# EAGLE board napajanje (EAGLE 3.55)
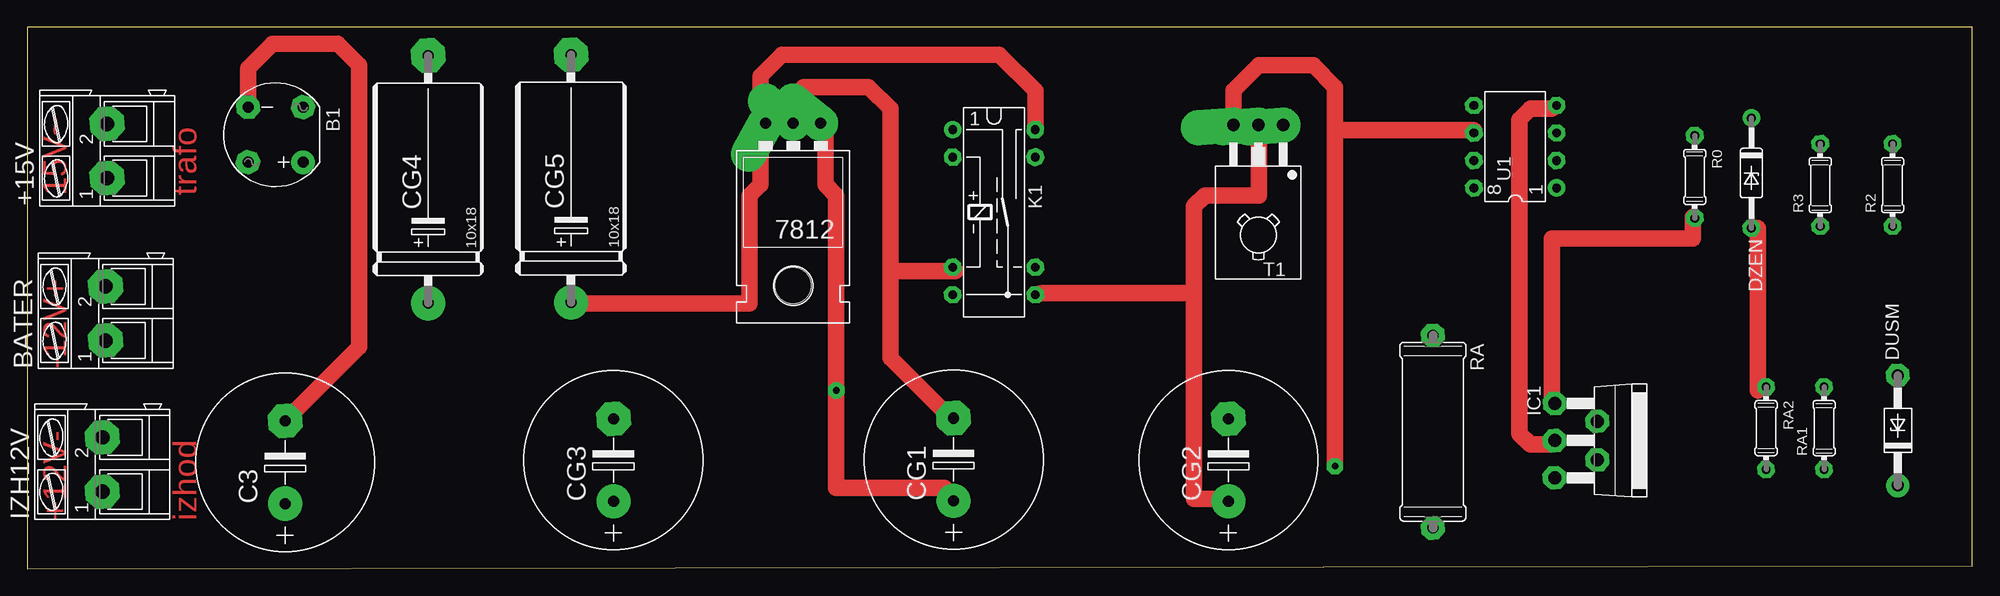
[diagram p0: board, top side]
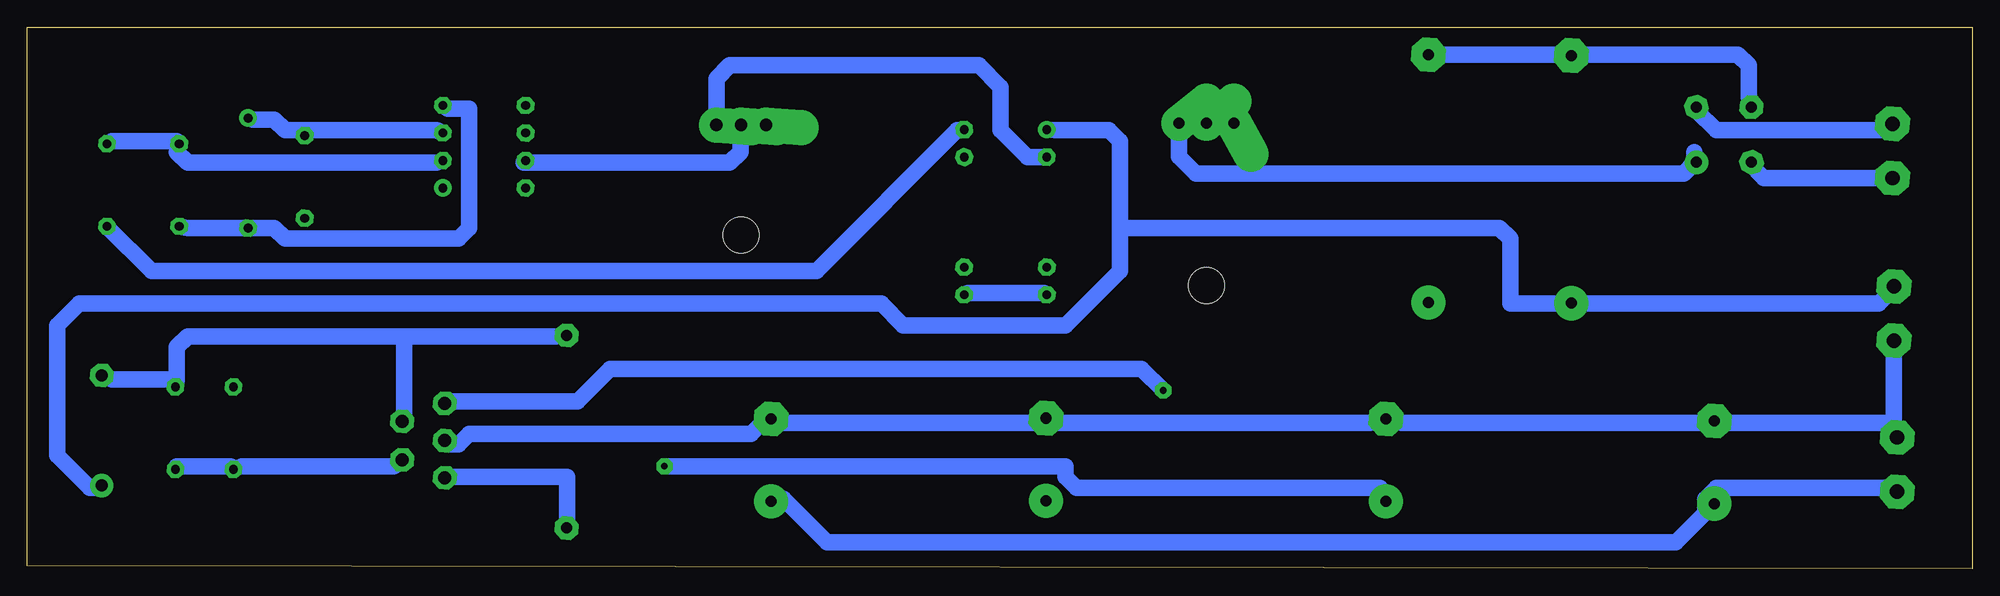
[diagram p1: board, bottom side, seen from below]

Size 179.42 x 50 mm. Coordinates in mm from the lower left corner, seen from the top.
Outline: 0,0 179.42,0.27 179.42,50 0,50 0,0
Copper layers used: Top, Bottom

## Footprints (pad centres in the part's own frame; a part is rotated, then mirrored left to right if it is on the bottom)
XXL = drill 1.016 pad 3.251 offset:  -2.54,-3.81;  0,-3.81;  2.54,-3.81 | hole 3.302: 0,11.176
300/2 = drill 1.321 pad 3.15 octagon:  -2.515,0;  2.489,0
1A = drill 1.016 pad 2.159 round:  -2.54,2.54 | drill 1.016 pad 2.159 octagon:  2.54,2.54;  2.54,-2.54;  -2.54,-2.54
,5-16 = drill 1.016 pad 3.15 octagon:  3.81,0 | drill 1.016 pad 3.15 round:  -3.81,0
2-10 = drill 1.016 pad 3.15 round:  -11.43,0 | drill 1.016 pad 3.15 octagon:  11.43,0
41Z10 = drill 1.118 pad 2.159 round:  -5.08,0 | drill 1.118 pad 2.159 octagon:  5.08,0
35Z10 = drill 0.813 pad 1.6 round:  -5.08,0 | drill 0.813 pad 1.6 octagon:  5.08,0
00S = drill 1.194 pad 2.159 octagon:  -3.429,-8.509;  -1.778,-4.572;  0,-8.509;  1.778,-4.572;  3.429,-8.509
1U = drill 0.813 pad 1.6 round:  -7.62,-3.81 | drill 0.813 pad 1.6 octagon:  -5.08,-3.81;  5.08,-3.81;  7.62,-3.81;  7.62,3.81;  5.08,3.81;  -5.08,3.81;  -7.62,3.81
04/7 = drill 0.813 pad 1.6 octagon:  -3.81,0;  3.81,0
17/17 = drill 1.016 pad 2.159 octagon:  -8.89,0;  8.89,0
126 = drill 1.118 pad 3.251 offset:  -2.286,-5.08;  0,-5.08;  2.286,-5.08 | hole 3.302: 0,5.08
L08 = drill 0.813 pad 1.6 round:  -3.81,-3.81 | drill 0.813 pad 1.6 octagon:  -1.27,-3.81;  1.27,-3.81;  3.81,-3.81;  3.81,3.81;  1.27,3.81;  -1.27,3.81;  -3.81,3.81

## Placement (x,y rotation side)
7812  78XXL  [XXL]  70.66,37.32 180 top
+15V  AK300/2  [300/2]  7.37,38.58 90 top
B1  RB1A  [1A]  22.91,40.07 180 top
BATER  AK300/2  [300/2]  7.23,23.58 90 top
C3  E7,5-16  [,5-16]  23.8,9.83 90 top
CG1  E7,5-16  [,5-16]  85.45,10.1 90 top
CG2  E7,5-16  [,5-16]  110.8,10.05 90 top
CG3  E7,5-16  [,5-16]  54.08,10.04 90 top
CG4  E22-10  [2-10]  36.99,35.95 90 top
CG5  E22-10  [2-10]  50.16,36.01 90 top
DUSM  1N4728  [41Z10]  172.54,12.78 90 top
DZEN  BZX55  [35Z10]  159.04,36.53 270 top
IC1  L200  [00S]  149.4,11.84 270 top
IZH12V  AK300/2  [300/2]  6.94,9.64 90 top
K1  RR1U  [1U]  89.18,32.92 270 top
R0  0204/7  [04/7]  153.81,36.17 270 top
R2  0204/7  [04/7]  172.06,35.42 90 top
R3  0204/7  [04/7]  165.39,35.42 90 top
RA  0617/17  [17/17]  129.66,12.66 270 top
RA1  0204/7  [04/7]  165.74,12.99 90 top
RA2  0204/7  [04/7]  160.39,12.99 270 top
T1  BD235  [126]  113.56,35.89 180 top
U1  741P  [L08]  137.26,38.96 90 top

## Library data of the parts
7812 IC1 = v-reg
+15V BATER IZH12V = ptr500
B1 = rectif
C3 CG1-CG5 = polcap
DUSM DZEN = diode
K1 = relais
R0 R2 R3 RA RA1 RA2 = r
T1 = npn
U1 = linear

## Nets
+5V: BATER. CG4. DUSM. K1.
+12V: 7812. CG5. K1. R2.
+15V: 7812. B1. CG1. IC1. R0.
+18V: C3. CG2. IZH12V. K1. T1. U1.
GND: 7812. B1. BATER. C3. CG1. CG2. CG3. CG4. CG5. DZEN. IC1. IZH12V. K1. R3. RA2. U1.
N$1: CG3. T1. U1.
N$2: DZEN. R0. U1.
N$3: R2. R3. U1.
N$4: IC1. RA.
N$5: DUSM. IC1. RA1. RA.
N$6: K1. T1.
N$7: +15V. B1.
N$8: +15V. B1.
N$11: IC1. RA1. RA2.

## Tracks (layer width: path | path; a pad name or v marks a point on that pad's centre or on a via)
+5V
  Bottom 1.5: 78.63,31.47 78.63,39.47 79.63,40.47 84.63,40.47 85.37,40.54 | 78.63,31.47 43.63,31.47 42.63,30.47 42.63,24.47 37.63,24.47 36.99,24.52 35.63,24.47 8.63,24.47 7.13,25.97 | 7.13,25.97 6.63,26.47 | 78.63,31.47 78.63,27.47 83.63,22.47 98.63,22.47 100.63,24.47 174.63,24.47 176.63,22.47 176.63,10.47 173.63,7.47 172.63,7.47 172.63,7.61 172.54,7.7 | BATER. 6.63,25.47 7.13,25.97
+12V
  Top 1.5: 50.16,24.58 51.63,24.47 66.63,24.47 66.63,34.47 67.63,35.47 67.63,40.47 7812. 67.63,41.47 67.63,45.47 69.63,47.47 89.63,47.47 92.99,44.11 K1.
  Bottom 1.5: K1. 93.63,40.47 106.63,27.47 167.92,27.47 172.06,31.61
+15V  (via drill 0.61 pad 1.5)
  Top 1.5: R0. 153.63,32.47 153.63,30.47 140.63,30.47 140.63,15.47 140.89,15.27 | CG1. 84.63,7.47 74.63,7.47 v74.63,16.47 74.63,34.47 73.63,35.47 73.63,40.47 73.2,41.13
  Bottom 1.5: 25.45,37.53 25.63,38.47 25.63,37.47 26.63,36.47 71.63,36.47 73.2,38.04 73.2,41.13 | 140.89,15.27 140.63,15.47 128.63,15.47 125.63,18.47 76.63,18.47 v74.63,16.47
+18V
  Top 1.5: 107.63,25.47 107.63,33.47 108.63,34.47 113.63,34.47 113.63,39.47 113.56,40.97 | 107.63,25.47 107.63,6.47 109.63,6.47 CG2. | 107.63,25.47 93.63,25.47 92.99,25.3
  Bottom 1.5: 23.63,7.47 7.63,7.47 6.94,7.12 | 85.37,25.3 85.63,25.47 92.63,25.47 92.99,25.3 | 133.45,37.69 133.63,37.47 114.63,37.47 113.63,38.47 113.63,39.47 | 109.63,6.47 CG2. | 109.63,6.47 105.63,2.47 27.35,2.47 C3. 23.63,7.47 | 109.63,6.47 110.63,6.47 | 23.63,7.47 24.63,6.47 24.63,5.47 23.63,6.47 | 113.63,39.47 113.63,41.47 | 113.56,40.97 113.63,39.47
GND
  Top 1.5: 160.39,16.8 159.63,16.47 159.63,31.47 DZEN. | 85.63,27.47 85.37,27.84 85.37,27.47 79.63,27.47 | 70.63,42.47 70.66,41.13 70.66,43.5 71.63,44.47 77.63,44.47 79.63,42.47 79.63,27.47 | 79.63,27.47 79.63,19.47 85.13,13.97 | 85.13,13.97 85.63,13.47 | 85.45,13.91 84.63,13.47 85.13,13.97 | 140.89,11.84 140.63,11.47 138.63,11.47 137.63,12.47 137.63,41.47 138.63,42.47 140.63,42.47 141.07,42.77 | 20.37,42.61 20.37,46.21 22.63,48.47 28.63,48.47 30.63,46.47 30.63,20.47 23.8,13.64 23.63,13.47
  Bottom 1.5: CG5. 48.63,47.47 37.63,47.47 CG4. 35.63,47.47 21.63,47.47 20.63,46.47 20.63,43.47 20.37,42.61 | 165.39,31.61 164.63,31.47 159.63,31.47 DZEN. 158.63,31.47 156.63,31.47 155.63,30.47 139.63,30.47 138.63,31.47 138.63,42.47 140.63,42.47 141.07,42.77 | 140.89,11.84 140.63,11.58 140.63,11.47 139.63,11.47 138.63,12.47 112.63,12.47 111.63,13.47 110.8,13.86 109.63,13.47 86.63,13.47 85.45,13.91 84.63,13.47 55.63,13.47 54.08,13.85 52.63,13.47 24.63,13.47 23.8,13.64 22.63,13.47 7.63,13.47 IZH12V. 6.63,11.47 7.23,12.07 7.23,21.06
N$1  (via drill 0.61 pad 1.5)
  Top 1.5: v120.63,9.47 120.63,40.47 | T1. 111.27,44.11 113.63,46.47 118.63,46.47 120.63,44.47 120.63,40.47 | 133.45,40.23 133.45,40.47 120.63,40.47
  Bottom 1.5: v120.63,9.47 83.63,9.47 83.63,8.47 82.63,7.47 54.63,7.47 CG3.
N$2
  Bottom 1.5: 153.63,40.47 155.63,40.47 156.63,41.47 158.63,41.47 159.04,41.61 | 153.63,40.47 141.63,40.47 141.07,40.23 | 153.63,40.47 153.81,39.98
N$3
  Bottom 1.5: 141.07,37.69 141.63,37.47 164.63,37.47 165.63,38.47 R3. 165.63,39.47 171.63,39.47 R2.
N$4
  Bottom 1.5: RA. 129.63,4.47 129.63,8.47 140.63,8.47 IC1.
N$5
  Bottom 1.5: 165.63,17.47 171.63,17.47 DUSM. | 144.63,21.47 164.63,21.47 165.63,20.47 165.63,17.47 | 144.63,21.47 130.63,21.47 129.66,21.55 | 165.63,17.47 RA1. | 144.63,21.47 144.63,14.47 144.83,13.62
N$6
  Bottom 1.5: 115.85,40.97 115.85,45.25 114.63,46.47 91.63,46.47 89.63,44.47 89.63,40.47 87.16,38 85.37,38
N$7
  Bottom 1.5: 20.37,37.53 20.57,37.53 20.63,37.47 19.22,36.06 7.37,36.06
N$8
  Bottom 1.5: B1. 25.45,42.29 23.63,40.47 7.63,40.47 7.63,41.47 7.37,41.21 +15V.
N$11
  Bottom 1.5: 165.74,9.18 165.63,9.47 160.63,9.47 RA2. 159.63,9.47 145.63,9.47 144.83,10.06

## Text on the board
Top: 15V~ | trafo | -12V+ | +12V- | izhod